# Altium PCB MOTHER BORRADOR.PcbDoc
Units mil, origin at the board's own origin, x right, y up, seen from the top; angles counter-clockwise.
Board outline 6000 x 4000 mil, 2 copper layers (Top Layer, Bottom Layer), stack 12.8 mil thick; 16 components, 23 nets, 84 pads, 8 vias.
Unrouted connection lines stored in the file: 9.
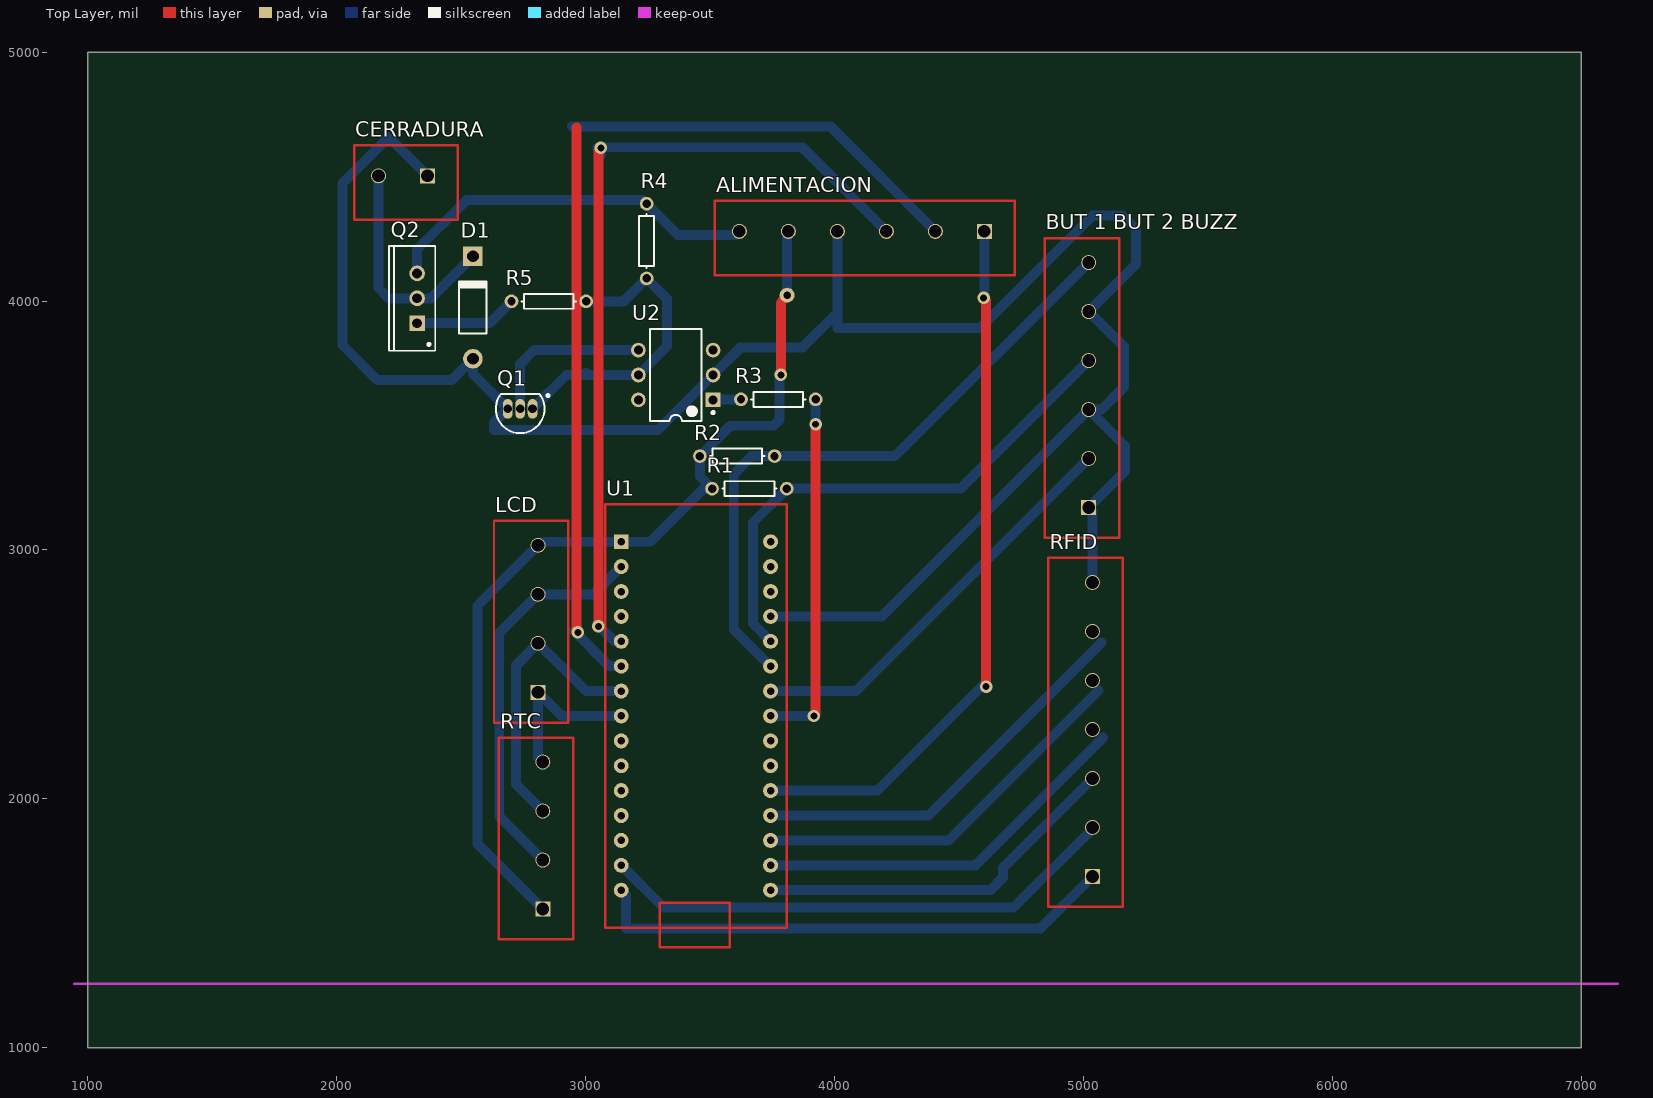
[diagram p0: Top Layer view]
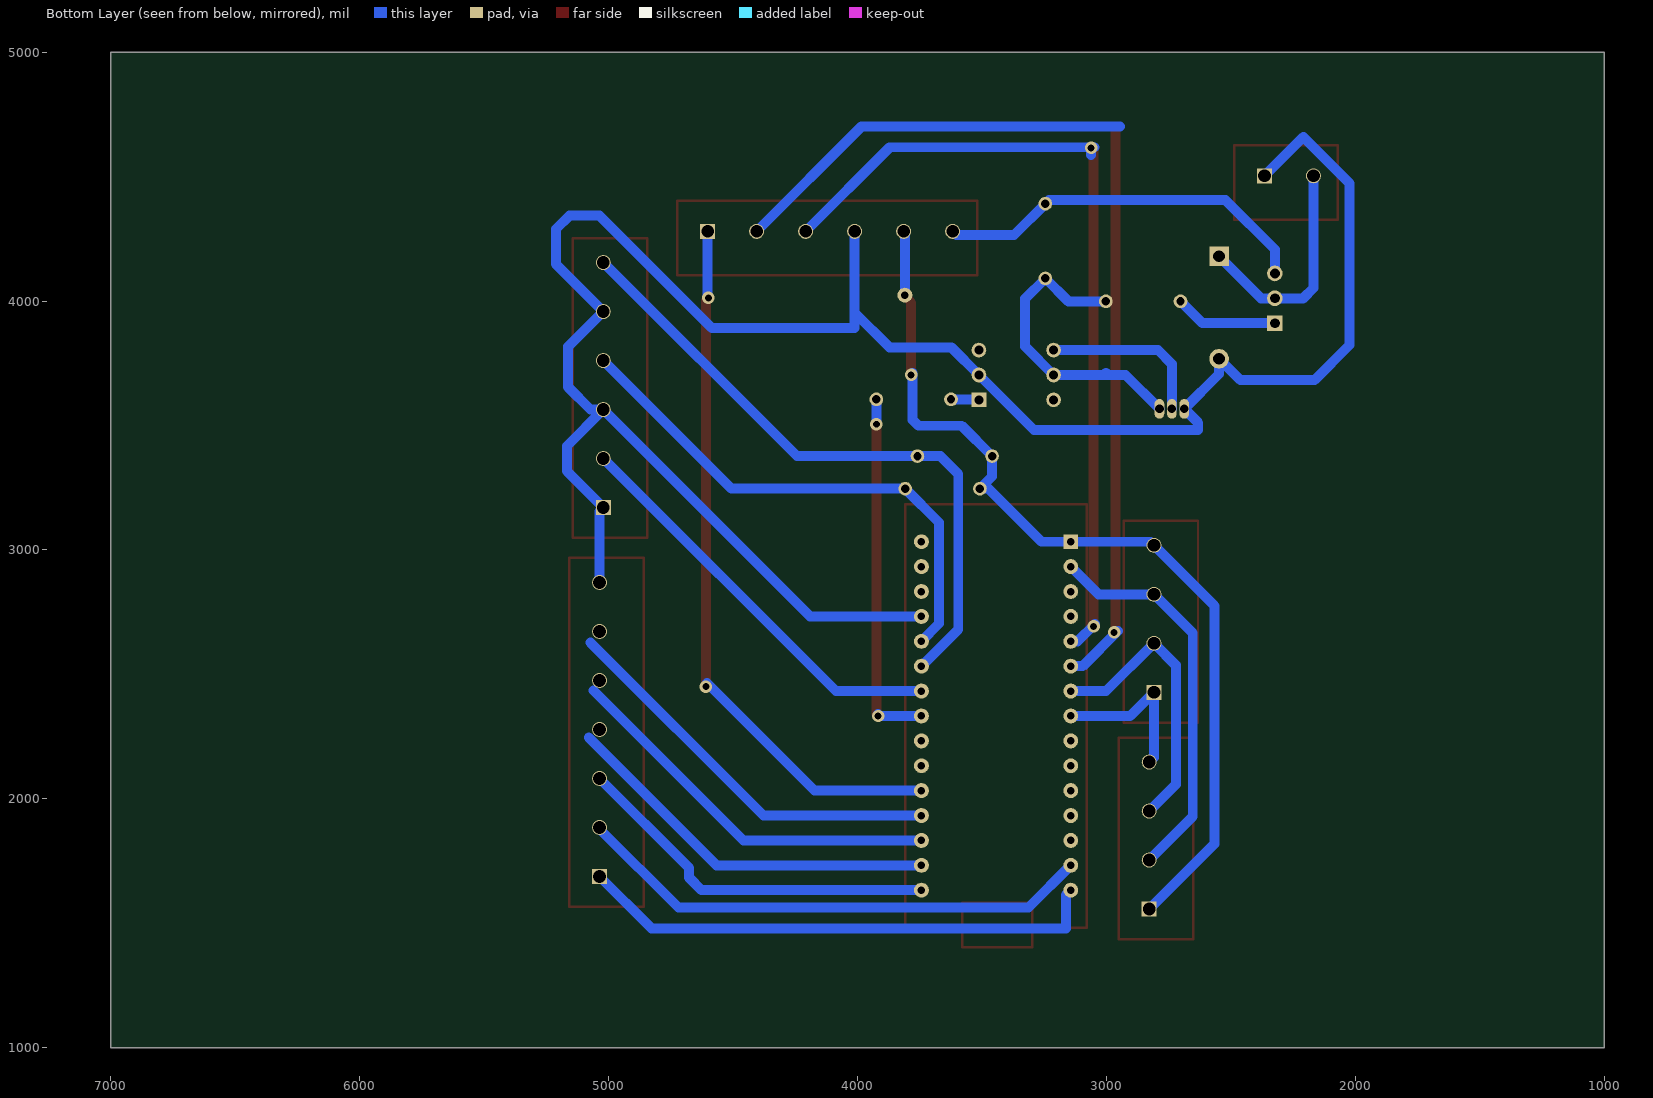
[diagram p1: Bottom Layer view, seen from below]

## Layer stack, top to bottom
Top Solder: solder mask 0.4, Solder Resist, Dk 3.5
Top Layer: signal copper 1.4
Dielectric 1: core 10, FR-4, Dk 4.2
Bottom Layer: signal copper 1.4
Bottom Solder: solder mask 0.4, Solder Resist, Dk 3.5

## Board outline
1000,1000 7000,1000 7000,5000 1000,5000

## Design rules (kind name [scope] priority, off if disabled: settings)
Clearance [All   -     InComponent('U1')        - 'ROOM 1' vs All   -     InComponent('U1')      - 'ROOM 1'] p1: gap=100 ignorepadtopadclearanceinfootprint=FALSE except(50: Arc-Arc Arc-Track Track-Track)
DiffPairsRouting [All] p1: maxlimit=160 minlimit=160 mostfreqgap=160 toplayer_minwidth=20 toplayer_maxwidth=80 toplayer_prefwidth=40 bottomlayer_minwidth=20 bottomlayer_maxwidth=80 bottomlayer_prefwidth=40 maxuncoupledlength=500
PolygonConnect [All] p1: connectstyle=Relief reliefconductorwidth=10 reliefentries=4 polygonreliefangle="90 Angle" airgapwidth=10
RoomDefinition "ESQUEMATICO MOTHER" [InComponentClass('ESQUEMATICO MOTHER')] p1: confinementstyle=ConfineIn formatcopy=TRUE lockcomponents=FALSE outline 0,0 2000,0 2000,1000 0,1000
RoutingVias [All] p1: holewidth=28 width=50 viastyle="Through Hole" minholewidth=28 minwidth=50 maxholewidth=28 maxwidth=50
SolderMaskExpansion [All] p1: expansion=4
UnRoutedNet [All] p1: checkbadconnections=TRUE
Width [All] p1: maxlimit=40 minlimit=40 preferedwidth=40
28 further rules are at their usual default settings.

## Components (designator, comment, footprint, x,y, rotation, side; value= is the part's Value field where it differs from the comment)
ALIMENTACION "Header 6" "BORNERA 6 PIN"#1 4724.9,4102.83 r180 top
"BUT 1 BUT 2 BUZZ" "Header 6" "BORNERA 6 PIN"#2 4844.83,3048.4 r90 top
CERRADURA "Header 2" "Bornera 2 pin" 2487.9,4325.83 r180 top
D1 "Diode 1N4007" DO-41 2548,3974 r90 top
LCD "Header 4" "BORNERA 4 PIN"#1 2632.83,2306.1 r90 top
Q1 "BC548" TO-92A 2738,3567 r90 top
Q2 "TIP32" TO-220AB 2324,4011 r90 top
R1 "Res1" AXIAL-0.3 3659,3246 r180 top value=1K
R2 "Res1" AXIAL-0.3 3610,3377 r180 top value=1K
R3 "Res1" AXIAL-0.3 3775,3605 r180 top value=1K
R4 "Res1" AXIAL-0.3 3246,4241 r90 top value=1K
R5 "Res1" AXIAL-0.3 2853,3999 r180 top value=1K
RFID "Header 7" "BORNERA 7 PIN" 4859.83,1566.25 r90 top
RTC "Header 4" "BORNERA 4 PIN"#2 2651.83,1435.25 r90 top
U1 "Arduino Nano" "Arduino nano" 3144,3033 r0 top
U2 "Optoisolator1" DIP-6 3363,3703 r180 top

## Footprints (in the part's own frame and the unit in brackets; to place one, negate y for a bottom-side part, rotate by r counter-clockwise, add the part's x,y. Pads: shape width x height; smd on the part's side, far side on the other; paste and mask are expansions set on the pad)
"Arduino nano" [mil]
  rect 60x60 hole 30: 1(0,0)
  round 60 hole 30: 2(0,-100) 3(0,-200) 4(0,-300) 5(0,-400) 6(0,-500) 7(0,-600) 8(0,-700) 9(0,-800) 10(0,-900) 11(0,-1000) 12(0,-1100) 13(0,-1200) 14(0,-1300) 15(0,-1400) 16(600,-1400) 17(600,-1300) 18(600,-1200) 19(600,-1100) 20(600,-1000) 21(600,-900) 22(600,-800) 23(600,-700) 24(600,-600) 25(600,-500) 26(600,-400) 27(600,-300) 28(600,-200) 29(600,-100) 30(600,0)
  Top Layer lines w10: -65,-1550 665,-1550 665,150 -65,150 -65,-1550 ; 155,-1630 155,-1550 155,-1450 435,-1450 435,-1550 435,-1630 155,-1630
AXIAL-0.3 [mm] "Axial Device, Thru-Hole; 2 Leads; 0.3 in Pin Spacing"
  round 1.4 hole 0.85: 1(-3.81,0) 2(3.81,0)
  silkscreen extent -2.77,-0.76 2.77,0.76
"Bornera 2 pin" [mm]
  rect 1.524x1.524 hole 1.3: 1(3.1,-4.5)
  round 1.524 hole 1.3: 2(8.1,-4.5)
  Top Layer lines w0.254: 10.6,0 0,0 0,-6.151 0,-7.6 10.6,-7.6 10.6,-7 10.6,-5.828 10.6,0
"BORNERA 4 PIN"#1 [mm]
  rect 1.524x1.524 hole 1.3: 1(3.1,-4.5)
  round 1.524 hole 1.3: 2(8.1,-4.5) 3(13.1,-4.5) 4(18.1,-4.5)
  Top Layer lines w0.254: 0,0 0,-7.6 4.133,-7.6 11.733,-7.6 19.145,-7.6 20.6,-7.6 20.6,-7 20.6,0 19.671,0 18.1,0 13.6,0 0,0
"BORNERA 4 PIN"#2 [mm]
  rect 1.524x1.524 hole 1.3: 1(3.1,-4.5)
  round 1.524 hole 1.3: 2(8.1,-4.5) 3(13.1,-4.5) 4(18.1,-4.5)
  Top Layer lines w0.254: 0,0 3.1,0 3.984,0 20.211,0 20.6,0 20.6,-7 20.6,-7.6 20.211,-7.6 18.1,-7.6 16.529,-7.6 5.862,-7.6 0,-7.6 0,0
"BORNERA 6 PIN"#1 [mm]
  rect 1.524x1.524 hole 1.3: 1(3.1,-4.5)
  round 1.524 hole 1.3: 2(8.1,-4.5) 3(13.1,-4.5) 4(18.1,-4.5) 5(23.1,-4.5) 6(28.1,-4.5)
  Top Layer lines w0.254: 30.6,0 30.6,-7 30.6,-7.6 29.397,-7.6 2.004,-7.6 1.114,-7.6 0,-7.6 0,-5.77 0,0 30.6,0
"BORNERA 6 PIN"#2 [mm]
  rect 1.524x1.524 hole 1.3: 1(3.1,-4.5)
  round 1.524 hole 1.3: 2(8.1,-4.5) 3(13.1,-4.5) 4(18.1,-4.5) 5(23.1,-4.5) 6(28.1,-4.5)
  Top Layer lines w0.254: 0,0 30.6,0 30.6,-5.846 30.6,-6.329 30.6,-7 30.6,-7.6 0,-7.6 0,-6.217 0,0
"BORNERA 7 PIN" [mm]
  rect 1.524x1.524 hole 1.3: 1(3.1,-4.5)
  round 1.524 hole 1.3: 2(8.1,-4.5) 3(13.1,-4.5) 4(18.1,-4.5) 5(23.1,-4.5) 6(28.1,-4.5) 7(33.1,-4.5)
  Top Layer lines w0.254: 0,0 0,-1.782 0,-3.001 0,-7.269 0,-7.6 35.6,-7.6 35.6,-7 35.6,-6.075 35.6,0 31.402,0 29.525,0 4.566,0 0.795,0 0,0
DIP-6 [mm] "DIP; 6 Leads; Row Spacing 7.62 mm; Pitch 2.54 mm"
  rect 1.5x1.5 hole 0.9: 1(-3.81,2.54)
  round 1.5 hole 0.9: 2(-3.81,0) 3(-3.81,-2.54) 4(3.81,-2.54) 5(3.81,0) 6(3.81,2.54)
  silkscreen extent -3.94,-4.7 2.65,4.7, body extent -3.55,-4.7 3.55,4.7, height 5.46
DO-41 [mm] "Diode, Axial; Body 5.2 x 2.7 mm (LxDia. max), Lead Dia. 0.86 mm (max)"
  round 2 hole 1.2: 1(-5.23,0)
  rect 2x2 hole 1.2: 2(5.23,0)
  silkscreen extent -2.65,-1.4 2.75,1.4
TO-92A [mm] "TO, Flat Index; 3 In-Line, Axial Leads; Body Dia. 4.5mm; Leads 0.51 x 0.48 mm (max)"
  oval 2x1 hole 0.9: 1(0,-1.27) 2(0,0) 3(0,1.27)
  silkscreen extent -2.48,-2.96 1.5,2.48, body extent -2.48,-2.5 1.5,2.5, height 6.86
TO-220AB [mm] "TO, Thru-Hole, Vertical, Heatsink Mounted; 3 In-Line Leads; Pitch 2.54 mm"
  rect 1.6x1.6 hole 1: 1(-2.54,0)
  round 1.6 hole 1: 2(0,0) 3(2.54,0)
  silkscreen extent -5.35,-1.85 5.35,2.85, body extent -5.4,-1.9 5.4,2.9, height 19.3

## Part data
ALIMENTACION "BUT 1 BUT 2 BUZZ": "Header, 6-Pin", LatestRevisionDate=17-Jul-2002, LatestRevisionNote="Re-released for DXP Platform.", Publisher="Altium Limited"
CERRADURA: "Header, 2-Pin", LatestRevisionDate=17-Jul-2002, LatestRevisionNote="Re-released for DXP Platform.", Publisher="Altium Limited"
D1: "1 Amp General Purpose Rectifier", Code_JEDEC=DO-204-AL, ComponentLink1Description="Manufacturer Link", ComponentLink1URL=http://www.fairchildsemi.com/, ComponentLink2Description=Datasheet, ComponentLink2URL=http://www.fairchildsemi.com/ds/1N%2F1N4001.pdf, DatasheetVersion=1998, LatestRevisionDate=17-Jul-2002, LatestRevisionNote="Re-released for DXP Platform.", PackageDescription="Diode, Axial; Body 5.2 x 2.7 mm (LxDia. max), Lead Dia. 0.86 mm (max)", PackageReference=DO-41, PackageVersion=Aug-1999, Published=8-Jun-2000, Publisher="Altium Limited"
LCD RTC: "Header, 4-Pin", LatestRevisionDate=17-Jul-2002, LatestRevisionNote="Re-released for DXP Platform.", Publisher="Altium Limited"
Q1: library part 2N3904, "NPN General Purpose Amplifier", ComponentLink1Description="Manufacturer Link", ComponentLink1URL=http://www.fairchildsemi.com/, ComponentLink2Description=Datasheet, ComponentLink2URL=http://www.fairchildsemi.com/ds/2N%2F2N3904.pdf, DatasheetVersion=1997, LatestRevisionDate=15-Jan-2003, LatestRevisionNote="PCB Footprint 'BCY-W3/D4.7' replaced", PackageDescription="TO, Flat Index; 3 In-Line, Axial Leads; Body Dia. 4.5mm; Leads 0.51 x 0.48 mm (max)", PackageReference=TO-92A, PackageVersion=Sep-1998, Published=8-Jun-2000, Publisher="Altium Limited"
Q2: library part 2N3906, "PNP General Purpose Amplifier", ComponentLink1Description="Manufacturer Link", ComponentLink1URL=http://www.fairchildsemi.com/, ComponentLink2Description=Datasheet, ComponentLink2URL=http://www.fairchildsemi.com/ds/2N%2F2N3906.pdf, DatasheetVersion=1997, LatestRevisionDate=15-Jan-2003, LatestRevisionNote="PCB Footprint 'BCY-W3/D4.7' replaced", PackageDescription="TO, Flat Index; 3 In-Line, Axial Leads; Body Dia. 4.5mm; Leads 0.51 x 0.48 mm (max)", PackageReference=TO-92A, PackageVersion=Sep-1998, Published=8-Jun-2000, Publisher="Altium Limited"
R1 R2 R3 R4 R5: "Resistor", LatestRevisionDate=17-Jul-2002, LatestRevisionNote="Re-released for DXP Platform.", PackageDescription="Axial Device, Thru-Hole; 2 Leads; 0.3 in Pin Spacing", PackageReference=AXIAL-0.3, Published=8-Jun-2000, Publisher="Altium Limited"
RFID: "Header, 7-Pin", LatestRevisionDate=17-Jul-2002, LatestRevisionNote="Re-released for DXP Platform.", Publisher="Altium Limited"
U1: library part Component_1
U2: "4-Pin Phototransistor Optocoupler", DatasheetVersion=Nov-2003, LatestRevisionDate=04-Mar-2005, LatestRevisionNote="Sch pins 3 & 4 Swapped.", PackageReference=DIP-4, Published=24-Mar-1999, Publisher="Altium Limited"

## Free pads (board coordinates)
  round 60 hole 30: 2(3810.45,4023.45)

## Via types
v1: diameter 50, hole 28, Top Layer to Bottom Layer, 8 vias

## Nets (pads, with @x,y where several pads share a name; then routed paths per layer and width w, separated by ;. In a path a pad name is that pad's centre, name@x,y a point inside that pad or via, vN(x,y) a via of type N, cw(c..) or ccw(c..) an arc to the next point about the centre after c; other vN are vias at no path point)
GND: "BUT 1 BUT 2 BUZZ.1" "BUT 1 BUT 2 BUZZ.3" "BUT 1 BUT 2 BUZZ.5" ALIMENTACION.4 CERRADURA.1 D1.1 LCD.3 Q1.3 RFID.7 RTC.2 U1.2 U1.27 U2.2 | length 10470.3
  Bottom Layer w40: CERRADURA.1 2209.85,4659 2024,4473.15 2024,3823 2164,3683 2462.91,3683 D1.1 2548,3707 Q1.3 2632,3511 2632,3482 3292,3482 U2.2 3624,3814 3872,3814 4012.3,3954.3 ; RTC.2 2654,1929.15 2654,2665.85 LCD.3 3032.85,2821.85 U1.2 ; U1.27 4190.85,2733 5022,3564.15 ; ALIMENTACION.4 4012.3,3954.3 ; RFID.7 5037,3155.45 5022,3170.45 5168,3316.45 5168,3418.15 5022,3564.15 ; 4012.3,3954.3 4012.3,3892 4586,3892 5037,4343 5158,4343 5212,4289 5212,4147.85 5022,3957.85 5163,3816.85 5163,3654 5073.15,3564.15 5022,3564.15
NetALIMENTACION_1: ALIMENTACION.6 Q2.3 R4.2 | length 1537.6
  Bottom Layer w40: Q2.3 2324,4207 2523,4406 3231,4406 R4.2 3372,4265 3603.6,4265 ALIMENTACION.6
NetALIMENTACION_2: ALIMENTACION.5 LCD.4 pad.2 R1.2 R2.2 RTC.1 U1.1 | length 3770.7
  Top Layer w40: v1(3785,3703) 3785,3993 pad.2
  Bottom Layer w40: RTC.1 2567,1819.3 2567,2775.7 LCD.4 2824.3,3033 U1.1 3261,3033 3474,3246 R1.2 3460,3295 R2.2 3582,3499 3756,3499 3780,3523 v1@3780,3712 ; pad.2 ALIMENTACION.5@3810.45,4280
NetALIMENTACION_4: ALIMENTACION.3 U1.5 | length 3352.4
  Top Layer w40: v1(3052,2693) 3052,4605 v1(3062,4615)
  Bottom Layer w40: v1@3047,2703 3117,2633 U1.5 ; v1@3048.82,4617.82 3871.33,4617.82 ALIMENTACION.3
NetALIMENTACION_5: ALIMENTACION.2 U1.6 | length 3912.3
  Top Layer w40: 2965,4697 2965,2674 v1(2970,2669)
  Bottom Layer w40: 2946,4702 3984,4702 ALIMENTACION.2 ; v1@2955,2674 3096,2533 U1.6
NetALIMENTACION_6: ALIMENTACION.1 U1.20 | length 2874.3
  Top Layer w40: v1(4600,4013) 4610,4003 v1(4610,2451)
  Bottom Layer w40: U1.20 4173,2033 v1@4605,2465 ; v1(4600,4013) 4602.85,4015.85 ALIMENTACION.1
"NetBUT 1 BUT 2 BUZZ_2": "BUT 1 BUT 2 BUZZ.2" U1.24 | length 1665
  Bottom Layer w40: U1.24 4087.7,2433 5022,3367.3
"NetBUT 1 BUT 2 BUZZ_4": "BUT 1 BUT 2 BUZZ.6" R2.1 U1.25 | length 2611.3
  Bottom Layer w40: U1.25 3596,2681 3596,3305 3668,3377 R2.1 4244.3,3377 5022,4154.7
"NetBUT 1 BUT 2 BUZZ_6": "BUT 1 BUT 2 BUZZ.4" R1.1 U1.26 | length 2125.1
  Bottom Layer w40: U1.26 3673,2704 3673,3110 R1.1 4507,3246 5022,3761
NetCERRADURA_1: CERRADURA.2 D1.2 Q2.2 | length 916.9
  Bottom Layer w40: CERRADURA.2 2169,4052 2210,4011 Q2.2 2379.09,4011 D1.2
NetLCD_3: LCD.2 RTC.3 U1.7 | length 1168.3
  Bottom Layer w40: RTC.3 2722,2058 2722,2537 LCD.2 3002,2433 U1.7
NetLCD_4: LCD.1 RTC.4 U1.8 | length 661.6
  Bottom Layer w40: RTC.4 2810,2166.85 LCD.1 2905.15,2333 U1.8
NetQ1_2: Q1.2 U2.4 | length 678.2
  Bottom Layer w40: Q1.2 2738,3747 2794,3803 U2.4
NetQ1_3: Q1.1 R4.1 R5.1 U2.5 | length 1243.9
  Bottom Layer w40: Q1.1 2924,3703 2994,3703 ; 3003,3712 2994,3703 ; R5.1 3154,3999 R4.1 3327,4010 3327,3817 U2.5 2994,3703
NetQ2_2: Q2.1 R5.2 | length 415.5
  Bottom Layer w40: Q2.1 2615,3911 R5.2
NetR3_1: R3.1 U1.23 | length 1456.9
  Top Layer w40: v1(3918,2333) 3925,2340 v1(3925,3505)
  Bottom Layer w40: U1.23 v1(3918,2333) v1@3918,2341 ; v1(3925,3505) R3.1
NetR3_2: R3.2 U2.1 | length 112.8
  Bottom Layer w40: U2.1 3515,3605 R3.2
NetRFID_1: RFID.2 U1.14 | length 2094.5
  Bottom Layer w40: U1.14 3314,1563 4720.55,1563 RFID.2@5037,1879.45
NetRFID_2: RFID.1 U1.15 | length 2120.6
  Bottom Layer w40: U1.15 3164,1613 3164,1480 4828.7,1480 RFID.1
NetRFID_3: RFID.3 U1.16 | length 1501.8
  Bottom Layer w40: U1.16 4627,1633 4677,1683 4677,1722 RFID.3
NetRFID_4: RFID.4 U1.17 | length 1549.2
  Bottom Layer w40: U1.17 4567,1733 5080.5,2246.5
NetRFID_5: RFID.5 U1.18 | length 1567.1
  Bottom Layer w40: U1.18 4459,1833 5061.5,2435.5
NetRFID_6: RFID.6 U1.19 | length 1617.2
  Bottom Layer w40: U1.19 4379,1933 5073.5,2627.5
pads on no net: U1.3 U1.4 U1.9 U1.10 U1.11 U1.12 U1.13 U1.21 U1.22 U1.28 U1.29 U1.30 U2.3 U2.6
copper on no net: | length 19
  Bottom Layer w40: 3062,4586 3062,4605

## Keep-outs
Top Layer:
  lines w10: 946,1257 7148,1257